# Altium PCB Pic32Footprints.PcbDoc
Units mil, origin at the board's own origin, x right, y up, seen from the top; angles counter-clockwise.
Board outline 6000 x 4000 mil, 2 copper layers (Top Layer, Bottom Layer); 4 components, 0 nets, 316 pads, 0 vias.
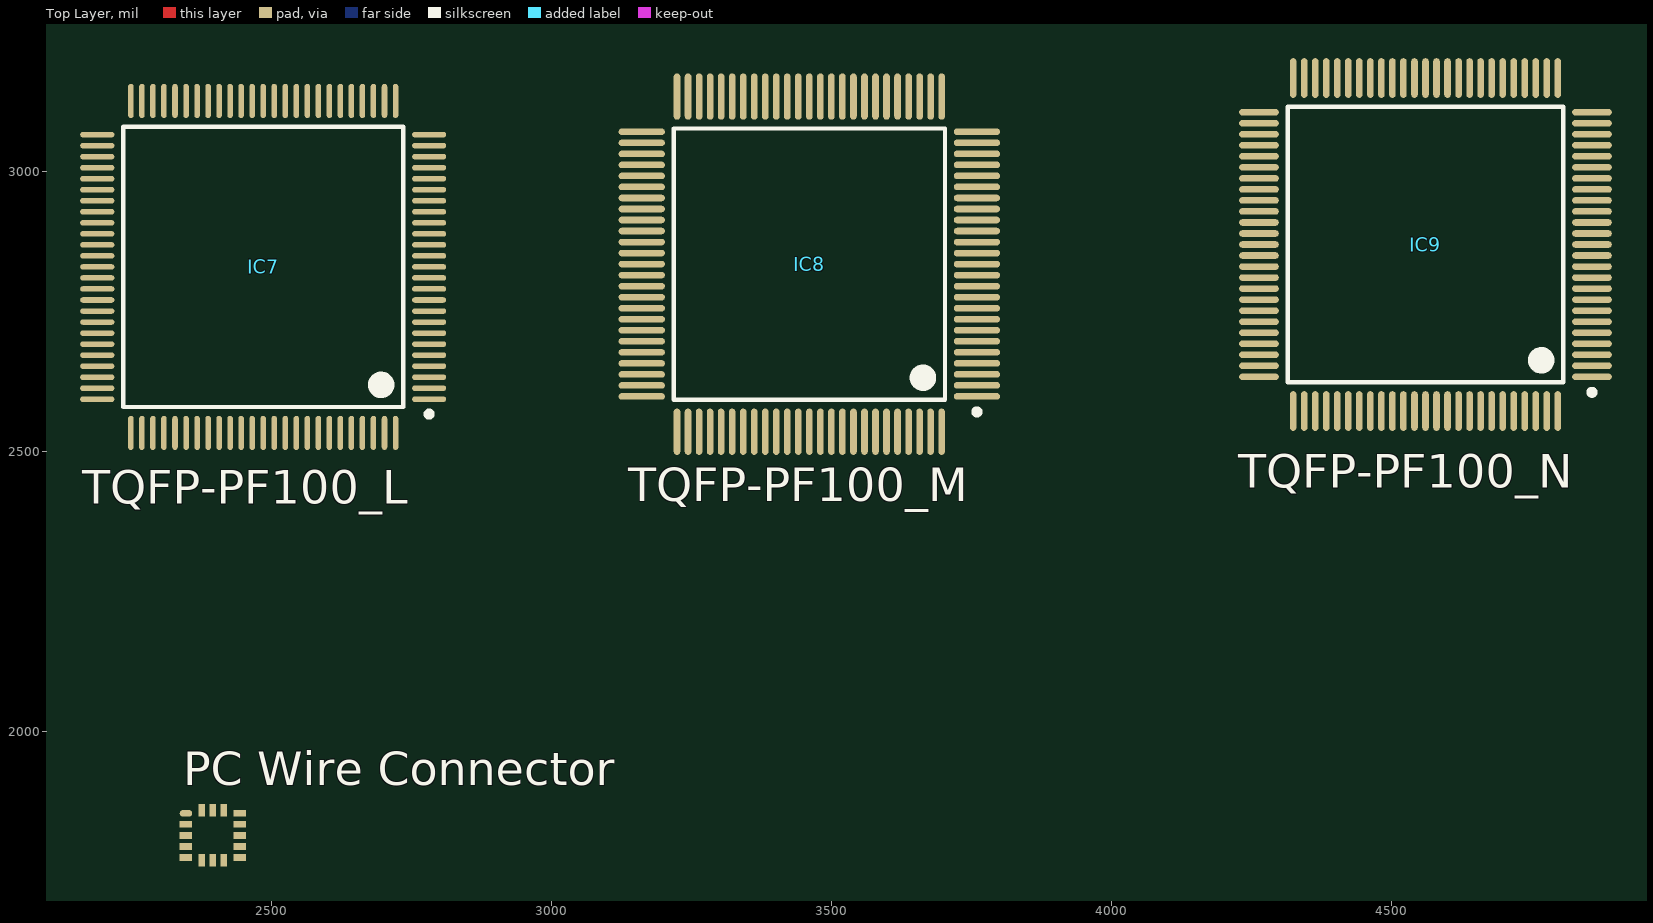
[diagram p0: Top Layer view]
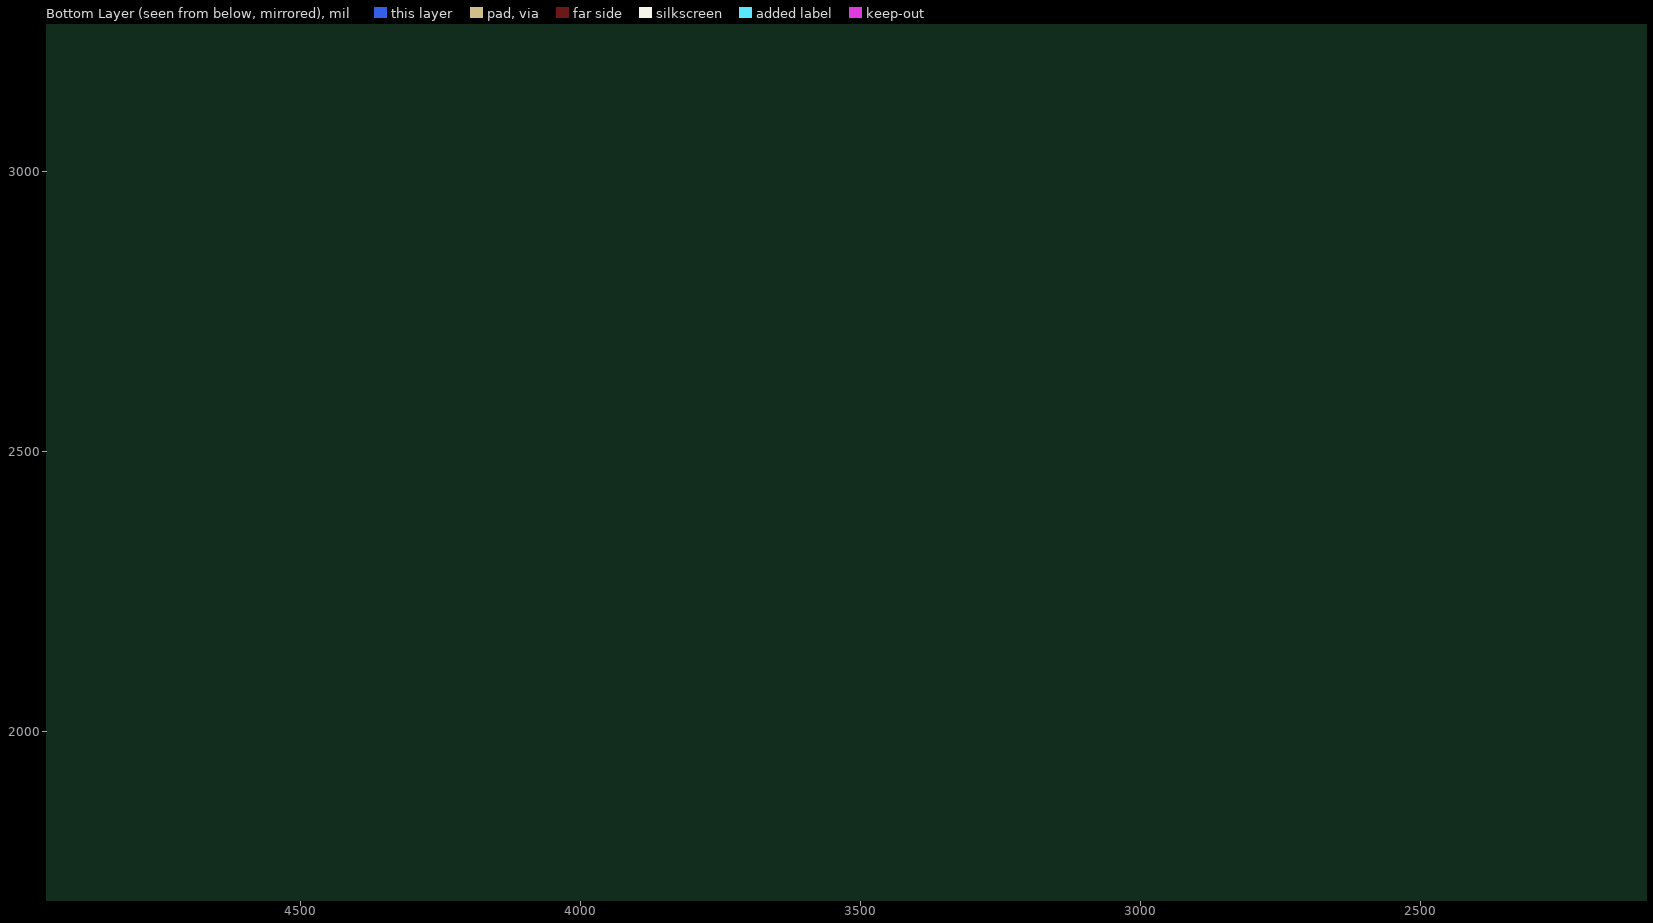
[diagram p1: Bottom Layer view, seen from below]

## Layer stack, top to bottom
Top Layer: signal copper 1.4
Dielectric: dielectric 12.6, FR-4, Dk 4.8
Bottom Layer: signal copper 1.4

## Board outline
1000,1000 7000,1000 7000,5000 1000,5000

## Design rules (kind name [scope] priority, off if disabled: settings)
Clearance [All] p1: gap=10
MinimumSolderMaskSliver [All] p1: minsoldermaskwidth=6
PolygonConnect [All] p1: connectstyle=Relief reliefconductorwidth=10 reliefentries=4 polygonreliefangle="90 Angle"
RoutingVias [All] p1: holewidth=28 width=50 viastyle="Through Hole" minholewidth=28 minwidth=50 maxholewidth=28 maxwidth=50
SilkscreenOverComponentPads [All] p1: minsilkscreentomaskgap=10
SolderMaskExpansion [All] p1: expansion=0
Width [All] p1: maxlimit=10 minlimit=10 preferedwidth=10
26 further rules are at their usual default settings.

## Components (designator, comment, footprint, x,y, rotation, side; value= is the part's Value field where it differs from the comment)
IC7 "TQFP-PF100_L" TQFP-PF100_L 2485,2830 r180 top
IC8 "TQFP-PF100_M" TQFP-PF100_M 3460,2835 r180 top (schematic designator IC7)
IC9 "TQFP-PF100_N" TQFP-PF100_N 4560,2870 r180 top (schematic designator IC7)
"PC Wire Connector" "Comment" MMA8452QT 2395,1815 r0 top

## Footprints (in the part's own frame and the unit in brackets; to place one, negate y for a bottom-side part, rotate by r counter-clockwise, add the part's x,y. Pads: shape width x height; smd on the part's side, far side on the other; paste and mask are expansions set on the pad)
MMA8452QT [mm]
  oval 0.567x0.3 smd: 1(-1.216,1)
  rect 0.567x0.3 smd: 2(-1.216,0.5) 3(-1.216,0) 4(-1.216,-0.5) 5(-1.216,-1) 9(1.216,-1) 10(1.216,-0.5) 11(1.216,0) 12(1.216,0.5) 13(1.216,1)
  rect 0.3x0.567 smd: 6(-0.5,-1.134) 7(0,-1.134) 8(0.5,-1.134) 14(0.5,1.134) 15(0,1.134) 16(-0.5,1.134)
TQFP-PF100_L [mm] "Thin QFP, 100-Leads, Body 14x14mm, Pitch 0.5mm, IPC High Density"
  oval 1.55x0.25 smd: 1(-7.525,6) 2(-7.525,5.5) 3(-7.525,5) 4(-7.525,4.5) 5(-7.525,4) 6(-7.525,3.5) 7(-7.525,3) 8(-7.525,2.5) 9(-7.525,2) 10(-7.525,1.5) 11(-7.525,1) 12(-7.525,0.5) 13(-7.525,0) 14(-7.525,-0.5) 15(-7.525,-1) 16(-7.525,-1.5) 17(-7.525,-2) 18(-7.525,-2.5) 19(-7.525,-3) 20(-7.525,-3.5) 21(-7.525,-4) 22(-7.525,-4.5) 23(-7.525,-5) 24(-7.525,-5.5) 25(-7.525,-6) 51(7.525,-6) 52(7.525,-5.5) 53(7.525,-5) 54(7.525,-4.5) 55(7.525,-4) 56(7.525,-3.5) 57(7.525,-3) 58(7.525,-2.5) 59(7.525,-2) 60(7.525,-1.5) 61(7.525,-1) 62(7.525,-0.5) 63(7.525,0) 64(7.525,0.5) 65(7.525,1) 66(7.525,1.5) 67(7.525,2) 68(7.525,2.5) 69(7.525,3) 70(7.525,3.5) 71(7.525,4) 72(7.525,4.5) 73(7.525,5) 74(7.525,5.5) 75(7.525,6)
  oval 0.25x1.55 smd: 26(-6,-7.525) 27(-5.5,-7.525) 28(-5,-7.525) 29(-4.5,-7.525) 30(-4,-7.525) 31(-3.5,-7.525) 32(-3,-7.525) 33(-2.5,-7.525) 34(-2,-7.525) 35(-1.5,-7.525) 36(-1,-7.525) 37(-0.5,-7.525) 38(0,-7.525) 39(0.5,-7.525) 40(1,-7.525) 41(1.5,-7.525) 42(2,-7.525) 43(2.5,-7.525) 44(3,-7.525) 45(3.5,-7.525) 46(4,-7.525) 47(4.5,-7.525) 48(5,-7.525) 49(5.5,-7.525) 50(6,-7.525) 76(6,7.525) 77(5.5,7.525) 78(5,7.525) 79(4.5,7.525) 80(4,7.525) 81(3.5,7.525) 82(3,7.525) 83(2.5,7.525) 84(2,7.525) 85(1.5,7.525) 86(1,7.525) 87(0.5,7.525) 88(0,7.525) 89(-0.5,7.525) 90(-1,7.525) 91(-1.5,7.525) 92(-2,7.525) 93(-2.5,7.525) 94(-3,7.525) 95(-3.5,7.525) 96(-4,7.525) 97(-4.5,7.525) 98(-5,7.525) 99(-5.5,7.525) 100(-6,7.525)
  silkscreen extent -7.65,-6.35 6.35,6.8, body extent -7,-7 7,7, height 1.2
TQFP-PF100_M [mm] "Thin QFP, 100-Leads, Body 14x14mm, Pitch 0.5mm, IPC Low Density"
  oval 2.1x0.3 smd: 1(-7.6,6) 2(-7.6,5.5) 3(-7.6,5) 4(-7.6,4.5) 5(-7.6,4) 6(-7.6,3.5) 7(-7.6,3) 8(-7.6,2.5) 9(-7.6,2) 10(-7.6,1.5) 11(-7.6,1) 12(-7.6,0.5) 13(-7.6,0) 14(-7.6,-0.5) 15(-7.6,-1) 16(-7.6,-1.5) 17(-7.6,-2) 18(-7.6,-2.5) 19(-7.6,-3) 20(-7.6,-3.5) 21(-7.6,-4) 22(-7.6,-4.5) 23(-7.6,-5) 24(-7.6,-5.5) 25(-7.6,-6) 51(7.6,-6) 52(7.6,-5.5) 53(7.6,-5) 54(7.6,-4.5) 55(7.6,-4) 56(7.6,-3.5) 57(7.6,-3) 58(7.6,-2.5) 59(7.6,-2) 60(7.6,-1.5) 61(7.6,-1) 62(7.6,-0.5) 63(7.6,0) 64(7.6,0.5) 65(7.6,1) 66(7.6,1.5) 67(7.6,2) 68(7.6,2.5) 69(7.6,3) 70(7.6,3.5) 71(7.6,4) 72(7.6,4.5) 73(7.6,5) 74(7.6,5.5) 75(7.6,6)
  oval 0.3x2.1 smd: 26(-6,-7.6) 27(-5.5,-7.6) 28(-5,-7.6) 29(-4.5,-7.6) 30(-4,-7.6) 31(-3.5,-7.6) 32(-3,-7.6) 33(-2.5,-7.6) 34(-2,-7.6) 35(-1.5,-7.6) 36(-1,-7.6) 37(-0.5,-7.6) 38(0,-7.6) 39(0.5,-7.6) 40(1,-7.6) 41(1.5,-7.6) 42(2,-7.6) 43(2.5,-7.6) 44(3,-7.6) 45(3.5,-7.6) 46(4,-7.6) 47(4.5,-7.6) 48(5,-7.6) 49(5.5,-7.6) 50(6,-7.6) 76(6,7.6) 77(5.5,7.6) 78(5,7.6) 79(4.5,7.6) 80(4,7.6) 81(3.5,7.6) 82(3,7.6) 83(2.5,7.6) 84(2,7.6) 85(1.5,7.6) 86(1,7.6) 87(0.5,7.6) 88(0,7.6) 89(-0.5,7.6) 90(-1,7.6) 91(-1.5,7.6) 92(-2,7.6) 93(-2.5,7.6) 94(-3,7.6) 95(-3.5,7.6) 96(-4,7.6) 97(-4.5,7.6) 98(-5,7.6) 99(-5.5,7.6) 100(-6,7.6)
  silkscreen extent -7.73,-6.15 6.15,6.82, body extent -7,-7 7,7, height 1.2
TQFP-PF100_N [mm] "Thin QFP, 100-Leads, Body 14x14mm, Pitch 0.5mm, IPC Medium Density"
  oval 1.8x0.3 smd: 1(-7.55,6) 2(-7.55,5.5) 3(-7.55,5) 4(-7.55,4.5) 5(-7.55,4) 6(-7.55,3.5) 7(-7.55,3) 8(-7.55,2.5) 9(-7.55,2) 10(-7.55,1.5) 11(-7.55,1) 12(-7.55,0.5) 13(-7.55,0) 14(-7.55,-0.5) 15(-7.55,-1) 16(-7.55,-1.5) 17(-7.55,-2) 18(-7.55,-2.5) 19(-7.55,-3) 20(-7.55,-3.5) 21(-7.55,-4) 22(-7.55,-4.5) 23(-7.55,-5) 24(-7.55,-5.5) 25(-7.55,-6) 51(7.55,-6) 52(7.55,-5.5) 53(7.55,-5) 54(7.55,-4.5) 55(7.55,-4) 56(7.55,-3.5) 57(7.55,-3) 58(7.55,-2.5) 59(7.55,-2) 60(7.55,-1.5) 61(7.55,-1) 62(7.55,-0.5) 63(7.55,0) 64(7.55,0.5) 65(7.55,1) 66(7.55,1.5) 67(7.55,2) 68(7.55,2.5) 69(7.55,3) 70(7.55,3.5) 71(7.55,4) 72(7.55,4.5) 73(7.55,5) 74(7.55,5.5) 75(7.55,6)
  oval 0.3x1.8 smd: 26(-6,-7.55) 27(-5.5,-7.55) 28(-5,-7.55) 29(-4.5,-7.55) 30(-4,-7.55) 31(-3.5,-7.55) 32(-3,-7.55) 33(-2.5,-7.55) 34(-2,-7.55) 35(-1.5,-7.55) 36(-1,-7.55) 37(-0.5,-7.55) 38(0,-7.55) 39(0.5,-7.55) 40(1,-7.55) 41(1.5,-7.55) 42(2,-7.55) 43(2.5,-7.55) 44(3,-7.55) 45(3.5,-7.55) 46(4,-7.55) 47(4.5,-7.55) 48(5,-7.55) 49(5.5,-7.55) 50(6,-7.55) 76(6,7.55) 77(5.5,7.55) 78(5,7.55) 79(4.5,7.55) 80(4,7.55) 81(3.5,7.55) 82(3,7.55) 83(2.5,7.55) 84(2,7.55) 85(1.5,7.55) 86(1,7.55) 87(0.5,7.55) 88(0,7.55) 89(-0.5,7.55) 90(-1,7.55) 91(-1.5,7.55) 92(-2,7.55) 93(-2.5,7.55) 94(-3,7.55) 95(-3.5,7.55) 96(-4,7.55) 97(-4.5,7.55) 98(-5,7.55) 99(-5.5,7.55) 100(-6,7.55)
  silkscreen extent -7.68,-6.25 6.25,6.82, body extent -7,-7 7,7, height 1.2

## Part data
IC7 IC8 IC9: library part PIC32MX795F512L-80I/PT, "High Performance 80 MHz MIPS-Based 32-Bit Flash Microcontroller with USB, CAN and Ethernet, 512KB Program Memory, 100-pin TQFP, Industrial Temperature"

## Nets (pads, with @x,y where several pads share a name; then routed paths per layer and width w, separated by ;. In a path a pad name is that pad's centre, name@x,y a point inside that pad or via, vN(x,y) a via of type N, cw(c..) or ccw(c..) an arc to the next point about the centre after c; other vN are vias at no path point)
pads on no net: "PC Wire Connector.1" "PC Wire Connector.2" "PC Wire Connector.3" "PC Wire Connector.4" "PC Wire Connector.5" "PC Wire Connector.6" "PC Wire Connector.7" "PC Wire Connector.8" "PC Wire Connector.9" "PC Wire Connector.10" "PC Wire Connector.11" "PC Wire Connector.12" "PC Wire Connector.13" "PC Wire Connector.14" "PC Wire Connector.15" "PC Wire Connector.16" IC7.1 IC7.2 IC7.3 IC7.4 IC7.5 IC7.6 IC7.7 IC7.8 IC7.9 IC7.10 IC7.11 IC7.12 IC7.13 IC7.14 IC7.15 IC7.16 IC7.17 IC7.18 IC7.19 IC7.20 IC7.21 IC7.22 IC7.23 IC7.24 IC7.25 IC7.26 IC7.27 IC7.28 IC7.29 IC7.30 IC7.31 IC7.32 IC7.33 IC7.34 IC7.35 IC7.36 IC7.37 IC7.38 IC7.39 IC7.40 IC7.41 IC7.42 IC7.43 IC7.44 IC7.45 IC7.46 IC7.47 IC7.48 IC7.49 IC7.50 IC7.51 IC7.52 IC7.53 IC7.54 IC7.55 IC7.56 IC7.57 IC7.58 IC7.59 IC7.60 IC7.61 IC7.62 IC7.63 IC7.64 IC7.65 IC7.66 IC7.67 IC7.68 IC7.69 IC7.70 IC7.71 IC7.72 IC7.73 IC7.74 IC7.75 IC7.76 IC7.77 IC7.78 IC7.79 IC7.80 IC7.81 IC7.82 IC7.83 IC7.84 IC7.85 IC7.86 IC7.87 IC7.88 IC7.89 IC7.90 IC7.91 IC7.92 IC7.93 IC7.94 IC7.95 IC7.96 IC7.97 IC7.98 IC7.99 IC7.100 IC8.1 IC8.2 IC8.3 IC8.4 IC8.5 IC8.6 IC8.7 IC8.8 IC8.9 IC8.10 IC8.11 IC8.12 IC8.13 IC8.14 IC8.15 IC8.16 IC8.17 IC8.18 IC8.19 IC8.20 IC8.21 IC8.22 IC8.23 IC8.24 IC8.25 IC8.26 IC8.27 IC8.28 IC8.29 IC8.30 IC8.31 IC8.32 IC8.33 IC8.34 IC8.35 IC8.36 IC8.37 IC8.38 IC8.39 IC8.40 IC8.41 IC8.42 IC8.43 IC8.44 IC8.45 IC8.46 IC8.47 IC8.48 IC8.49 IC8.50 IC8.51 IC8.52 IC8.53 IC8.54 IC8.55 IC8.56 IC8.57 IC8.58 IC8.59 IC8.60 IC8.61 IC8.62 IC8.63 IC8.64 IC8.65 IC8.66 IC8.67 IC8.68 IC8.69 IC8.70 IC8.71 IC8.72 IC8.73 IC8.74 IC8.75 IC8.76 IC8.77 IC8.78 IC8.79 IC8.80 IC8.81 IC8.82 IC8.83 IC8.84 IC8.85 IC8.86 IC8.87 IC8.88 IC8.89 IC8.90 IC8.91 IC8.92 IC8.93 IC8.94 IC8.95 IC8.96 IC8.97 IC8.98 IC8.99 IC8.100 IC9.1 IC9.2 IC9.3 IC9.4 IC9.5 IC9.6 IC9.7 IC9.8 IC9.9 IC9.10 IC9.11 IC9.12 IC9.13 IC9.14 IC9.15 IC9.16 IC9.17 IC9.18 IC9.19 IC9.20 IC9.21 IC9.22 IC9.23 IC9.24 IC9.25 IC9.26 IC9.27 IC9.28 IC9.29 IC9.30 IC9.31 IC9.32 IC9.33 IC9.34 IC9.35 IC9.36 IC9.37 IC9.38 IC9.39 IC9.40 IC9.41 IC9.42 IC9.43 IC9.44 IC9.45 IC9.46 IC9.47 IC9.48 IC9.49 IC9.50 IC9.51 IC9.52 IC9.53 IC9.54 IC9.55 IC9.56 IC9.57 IC9.58 IC9.59 IC9.60 IC9.61 IC9.62 IC9.63 IC9.64 IC9.65 IC9.66 IC9.67 IC9.68 IC9.69 IC9.70 IC9.71 IC9.72 IC9.73 IC9.74 IC9.75 IC9.76 IC9.77 IC9.78 IC9.79 IC9.80 IC9.81 IC9.82 IC9.83 IC9.84 IC9.85 IC9.86 IC9.87 IC9.88 IC9.89 IC9.90 IC9.91 IC9.92 IC9.93 IC9.94 IC9.95 IC9.96 IC9.97 IC9.98 IC9.99 IC9.100